# Altium PCB amp.PcbDoc
Units mil, origin at the board's own origin, x right, y up, seen from the top; angles counter-clockwise.
Board outline 473.22 x 1102.36 mil, 2 copper layers (Top Layer, Bottom Layer); 19 components, 13 nets, 46 pads, 19 vias.
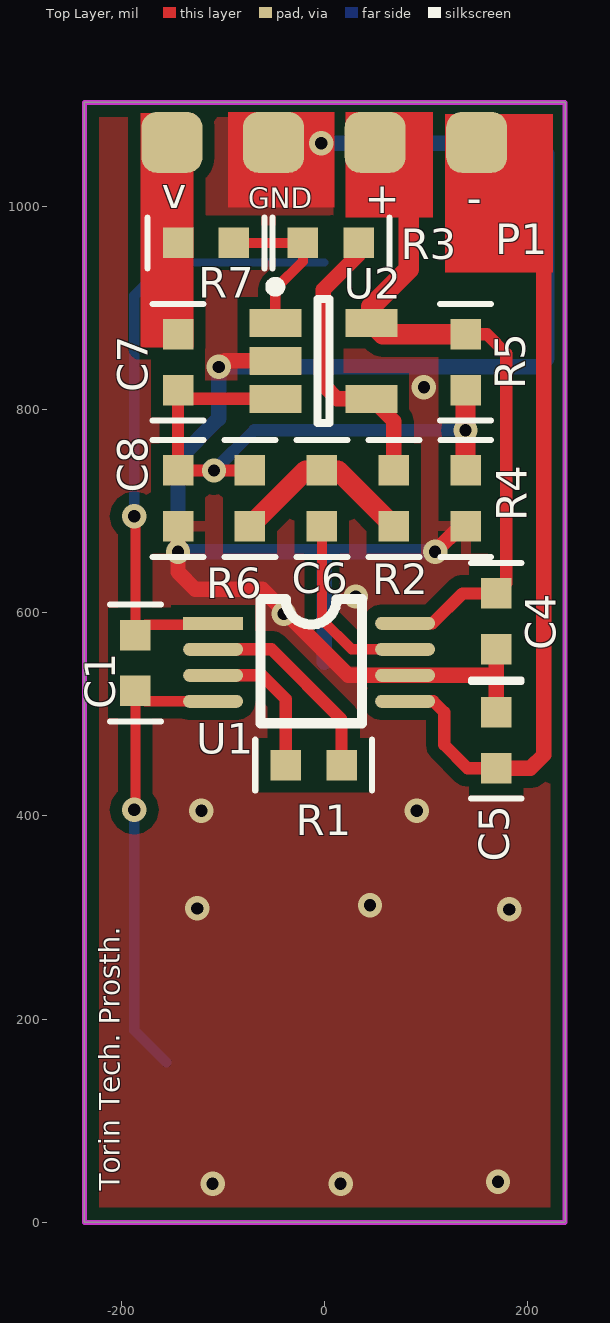
[diagram p0: Top Layer view]
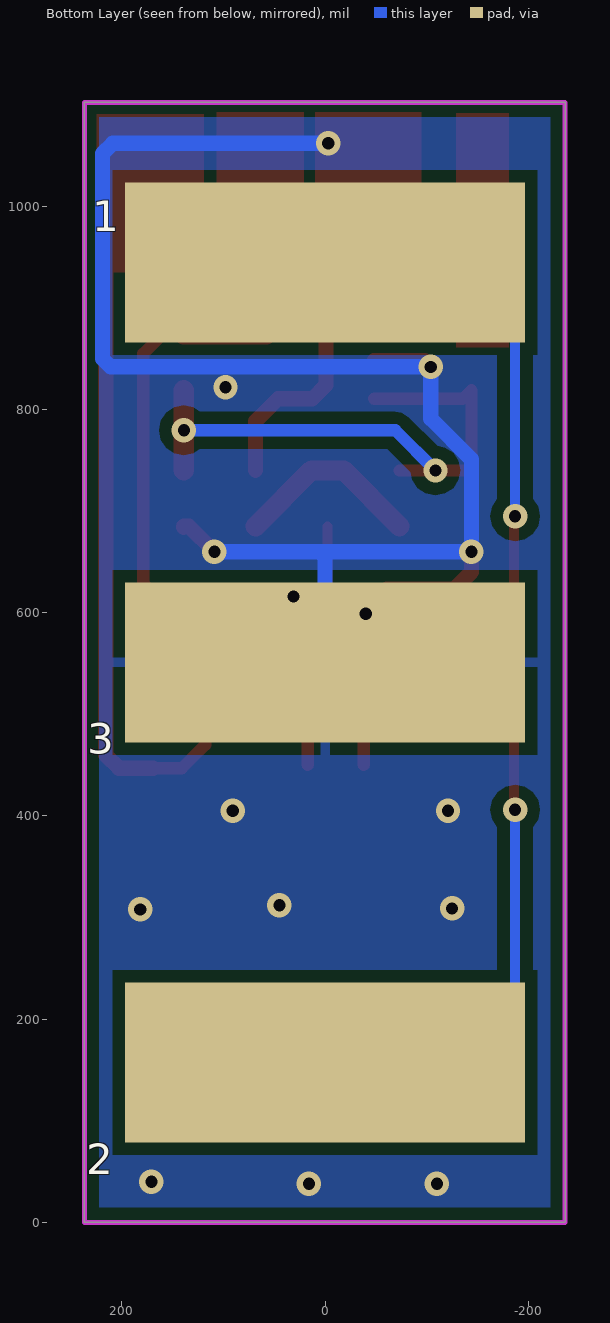
[diagram p1: Bottom Layer view, seen from below]

## Layer stack, top to bottom
Top Layer: signal copper 1.4
Dielectric: dielectric 12.6, FR-4, Dk 4.8
Bottom Layer: signal copper 1.4

## Board outline
-236.22,0 237,0 237,1102.36 -236.22,1102.36

## Design rules (kind name [scope] priority, off if disabled: settings)
AssemblyTestPointUsage [All] p1 off:
AssemblyTestpoint [All] p1 off: testpointundercomponent=TRUE minsize=40 maxsize=100 preferedsize=60 minholesize=0 maxholesize=40 preferedholesize=32 testpointgrid=1 usegrid=TRUE gridtolerance=0.01 allowsidetop=TRUE allowsidebottom=TRUE
Clearance Clearance_1 [InPolygon] p1: gap=12
Clearance [All] p2: gap=6
ComponentClearance [All] p1 off: gap=10 collisioncheckmode=3 verticalgap=10 showdistances=FALSE
DiffPairsRouting [All] p1 off: maxlimit=10 minlimit=10 mostfreqgap=10 maxuncoupledlength=500
FabricationTestPointUsage [All] p1 off: valid=0 allowmultiple=FALSE
FabricationTestpoint [All] p1 off: side=3 testpointundercomponent=TRUE minsize=40 maxsize=100 preferedsize=60 minholesize=0 maxholesize=40 preferedholesize=32 testpointgrid=1 allowsidetop=TRUE allowsidebottom=TRUE usegrid=TRUE gridtolerance=0.01
FanoutControl Fanout_BGA [IsBGA] p1 off: bgadir=Out bgaviamode=Centered fanoutstyle=Auto fanoutdirection=Alternating viagrid=1 // Fanout_BGA (Default Rule)
FanoutControl Fanout_LCC [IsLCC] p2 off: bgadir=Out bgaviamode=Centered fanoutstyle=Auto fanoutdirection=Alternating viagrid=1 // Fanout_LCC (Default Rule)
FanoutControl Fanout_SOIC [IsSOIC] p3 off: bgadir=Out bgaviamode=Centered fanoutstyle=Auto fanoutdirection=Alternating viagrid=1 // Fanout_SOIC (Default Rule)
FanoutControl Fanout_Small [(CompPinCount < 5)] p4 off: bgadir=Out bgaviamode=Centered fanoutstyle=Auto fanoutdirection=OutThenIn viagrid=1 // Fanout_Small (Default Rule)
FanoutControl Fanout_Default [All] p5 off: bgadir=Out bgaviamode=Centered fanoutstyle=Auto fanoutdirection=Alternating viagrid=1 // Fanout_Default (Default Rule)
Height [All] p1 off: minheight=0 maxheight=1000 prefheight=500
HoleSize [All] p1 off: absolutevalues=TRUE maxlimit=100 minlimit=1 maxpercent=80.000 minpercent=20.000
HoleToHoleClearance [All] p1 off: gap=10 allowstackedmicrovias=TRUE
LayerPairs [All] p1 off: enforce=TRUE
MinimumSolderMaskSliver [All] p1 off: minsoldermaskwidth=10
NetAntennae [All] p1 off: netantennaetolerance=0
PasteMaskExpansion [All] p1 off: expansion=0
PlaneClearance [All] p1 off: clearance=20
PlaneConnect [All] p1 off: planeconnectstyle=Relief reliefexpansion=20 reliefentries=4 reliefconductorwidth=10 reliefairgap=10
PolygonConnect PolygonConnect_1 [(InPadClass('All Pads'))] p1: connectstyle=Relief reliefconductorwidth=10 reliefentries=4 polygonreliefangle="90 Angle"
PolygonConnect [All] p2: connectstyle=Direct reliefconductorwidth=10 reliefentries=4 polygonreliefangle="90 Angle"
RoutingCorners [All] p1 off: cornerstyle=45-Degree minsetback=100 maxsetback=100
RoutingLayers [All] p1 off: top layer_v5=TRUE bottom layer_v5=TRUE
RoutingPriority [All] p1 off: routingpriority=0
RoutingTopology [All] p1 off: topology=Shortest
RoutingVias [All] p1: holewidth=12 width=24 viastyle="Through Hole" minholewidth=12 minwidth=24 maxholewidth=12 maxwidth=24
SilkToSilkClearance [All] p1 off: silktosilkclearance=10
SilkscreenOverComponentPads [All] p1 off: minsilkscreentomaskgap=10
SolderMaskExpansion [All] p1 off: expansion=4
Width [All] p1: maxlimit=20 minlimit=8 preferedwidth=8
2 further rules are at their usual default settings.

## Components (designator, comment, footprint, x,y, rotation, side; value= is the part's Value field where it differs from the comment)
1 "Electrode" elec-diff 0,872.88 r270 bottom locked
2 "Electrode" elec-diff 0,85.48 r270 bottom locked
3 "Electrode" elec-ref 0,479.18 r270 bottom locked
C1 "" 0603 -186,523 r90 top
C4 "Cap" 0603 169.22,619 r270 top
C5 "Cap" 0603 169.22,502 r270 top
C6 "" 0603 -2.39,740 r270 top
C7 "" 0603 -144,819 r90 top
C8 "" 0603 -144,685 r90 top
P1 "Header 4H" BAT3 0,1062.99 r0 top
R1 "" 0603 17,450 r180 top
R2 "" 0603 68.42,685 r90 top
R3 "" 0603 34,964 r180 top
R4 "" 0603 139.22,685 r90 top
R5 "" 0603 139,819 r90 top
R6 "" 0603 -73.19,740 r270 top
R7 "" 0603 -89,964 r180 top
U1 "" MSOP-8 -15,551.18 r0 top locked
U2 "AD8603" SOT23-5AM -1,848 r0 top

## Footprints (in the part's own frame and the unit in brackets; to place one, negate y for a bottom-side part, rotate by r counter-clockwise, add the part's x,y. Pads: shape width x height; smd on the part's side, far side on the other; paste and mask are expansions set on the pad)
0603 [mil]
  rect 30x30 smd: 1(0,0) 2(55,0)
  silkscreen extent -30,-25 85,25
BAT3 [mil]
  rrect50% 60x60 smd: 1(-150,0) 2(-50,0) 3(50,0) 4(150,0)
elec-diff [mm] "12*5mm"
  rect 4x10 smd: 1(-1.829,0)
elec-ref [mm] "12*5mm"
  rect 4x10 smd: 1(-1.829,0)
MSOP-8 [mm]
  rect 1.5x0.325 smd: 1(-2.4,0.975)
  oval 1.5x0.325 smd: 2(-2.4,0.325) 3(-2.4,-0.325) 4(-2.4,-0.975) 5(2.4,-0.975) 6(2.4,-0.325) 7(2.4,0.325) 8(2.4,0.975)
  silkscreen extent -1.22,-1.52 1.32,1.58
SOT23-5AM [mm] "SOT23, 5-Leads, Body 2.9x1.7mm, Pitch 0.95mm, Lead Span 2.8mm, IPC Low Density"
  rect 1.3x0.7 smd: 1(-1.2,0.95) 2(-1.2,0) 3(-1.2,-0.95) 4(1.2,-0.95) 5(1.2,0.95)
  silkscreen extent -1.32,-1.55 0.15,1.97, body extent -0.9,-1.55 0.9,1.55, height 1.45

## Part data
C1 C6 C7 C8: library part Cap, "Capacitor"
C4 C5: "Capacitor"
P1: "Header, 4-Pin, Right Angle"
R1 R2 R3 R4 R5 R6 R7: library part Res2, "Resistor"
U1: library part INA128UA, "Precision, Low-Power Instrumentation Amplifiers"

## Via types
v1: diameter 24, hole 12, Top Layer to Bottom Layer, tented both sides, 19 vias

## Nets (pads, with @x,y where several pads share a name; then routed paths per layer and width w, separated by ;. In a path a pad name is that pad's centre, name@x,y a point inside that pad or via, vN(x,y) a via of type N, cw(c..) or ccw(c..) an arc to the next point about the centre after c; other vN are vias at no path point)
+VS: C4.1 P1.3 R5.2 U1.8 U2.5 | length 693.8
  Top Layer w12: U1.8 106.57,589.57 136,619 C4.1 179,628.78 179,855 160,874 R5.2
  Top Layer w20: P1.3 83,1029.99 83,938 46.24,901.24 U2.5 57.65,874 R5.2
-VS: C5.2 P1.4 U1.5 | length 818.2
  Top Layer w12: U1.5 107.2,512.8 118,502 118,470 141,447 C5.2
  Top Layer w15: P1.4 150,1053 216,987 216,460 203,447 C5.2
GND: 3.1 C4.2 C5.1 C8.1 P1.2 R4.1 U1.6 U2.2 | length 1930.6
  Top Layer w15: C8.1 v1(-144,660) -144,640 -127,623 -61,623 23.61,538.39 U1.6 165.83,538.39 169.22,535 ; v1(-104,842) -98,848 U2.2 ; P1.2 -3.99,1062.99 v1(-3,1062) ; v1(109,660) 134,685 R4.1 R4.1@139.22,684.22 ; C5.1 169.22,535 ; C4.2 169.22,535
  Bottom Layer w15: v1@-107,842 v1(-104,842) ; v1(-3,1062) 209,1062 219,1052 219,850 211,842 v1(-104,842) ; 3.1 0,655 5,660 ; v1(109,660) 5,660 ; v1(-104,842) -104,791 -144,751 v1(-144,660) 5,660
  other v1: -110,38 16,38 171,40 182,308 -125,309 45,312 -121,405 91,405 -40,599 31,616 98,822
Net1_1: 1.1 C1.2 U1.1 | length 627.7
  Top Layer w10: v1(-187,695) -186,694 C1.2 -175.8,588.2 U1.1@-109.49,588.2
  Bottom Layer w8: 1.1@-168,944.88 1.1
  Bottom Layer w10: v1(-187,695) -187,912 1.1@-155.48,943.52
Net2_1: 2.1 C1.1 U1.4 | length 459.7
  Top Layer w10: v1(-187,406) -186,407 C1.1 -175.8,512.8 U1.4
  Bottom Layer w10: v1(-187,406) -187,189 2.1@-155.48,157.48
NetC6_1: C6.1 R2.1 R6.2 | length 187.2
  Top Layer w20: R6.2 -18.19,740 C6.1 13.41,740 R2.1
NetC6_2: C6.2 U1.7 | length 185.7
  Top Layer w10: C6.2 -2.39,593.39 27.02,563.98 U1.7
NetR1_1: R1.1 U1.2 | length 200.1
  Top Layer w12: U1.2 -51.98,563.98 17,495 R1.1
NetR1_2: R1.2 U1.3 | length 146.2
  Top Layer w12: U1.3 -61.39,538.39 -38,515 R1.2
NetR2_2: R2.2 R3.1 U2.4 | length 287.1
  Top Layer w15: R3.1 34,953 -1,918 -1,824 12.4,810.6 U2.4 68.42,788.43 R2.2
NetR3_2: R3.2 R7.1 U2.1 | length 157.9
  Top Layer w10: R7.1 R3.2 -21,946 -48.24,918.76 U2.1
REF: C7.1 C8.2 R4.2 R5.1 R6.1 U2.3 | length 592.1
  Top Layer w12: R6.1 v1(-108.6,740) C8.2 C7.1 -135.6,810.6 U2.3
  Top Layer w20: R5.1 v1(139,779.61) 139,740.22 R4.2
  Bottom Layer w12: v1(-108.6,740) -68.99,779.61 v1(139,779.61)
VOUT: C7.2 P1.1 R7.2 | length 191.5
  Top Layer w20: P1.1 -144,1056.99 C7.2

## Polygon pours and split planes (outlines as drawn)
GND on Bottom Layer "Keep-Out Layer-No Net" (solid, remove dead copper, pour order 2): -236.22,1102.36 236.22,1102.36 236.22,0 -236.22,0
GND on Top Layer "Keep-Out Layer-No Net" (solid, remove dead copper, pour order 2): -236.22,1102.36 236.22,1102.36 236.22,0 -236.22,0

## Keep-outs
Keep-Out Layer:
  lines w5: 236.22,0 -236.22,0 -236.22,1102.36 236.22,1102.36 ; 237,0 237,1102.36

## Other copper
Top Layer:
  rectangle net VOUT: -181,861 -129,1092
  rectangle net GND: -95,999 10,1093
  rectangle net +VS: 21,989 107,1093
  rectangle net -VS: 119,935 225,1091

## Silkscreen, mask and mechanical layers (free items; w line width, h text height)
Top Overlay:
  text "Torin Tech. Prosth." at -201.22,31.18 h20 r90

## Text inside footprints (layer, text, board x,y; h text height)
P1: Top Overlay "-" at 140,992.99 h30; Top Overlay "+" at 40,992.99 h30; Top Overlay "GND" at -75,997.99 h20; Top Overlay "v" at -160,997.99 h30